# EAGLE board VDA (EAGLE 9.6.2)
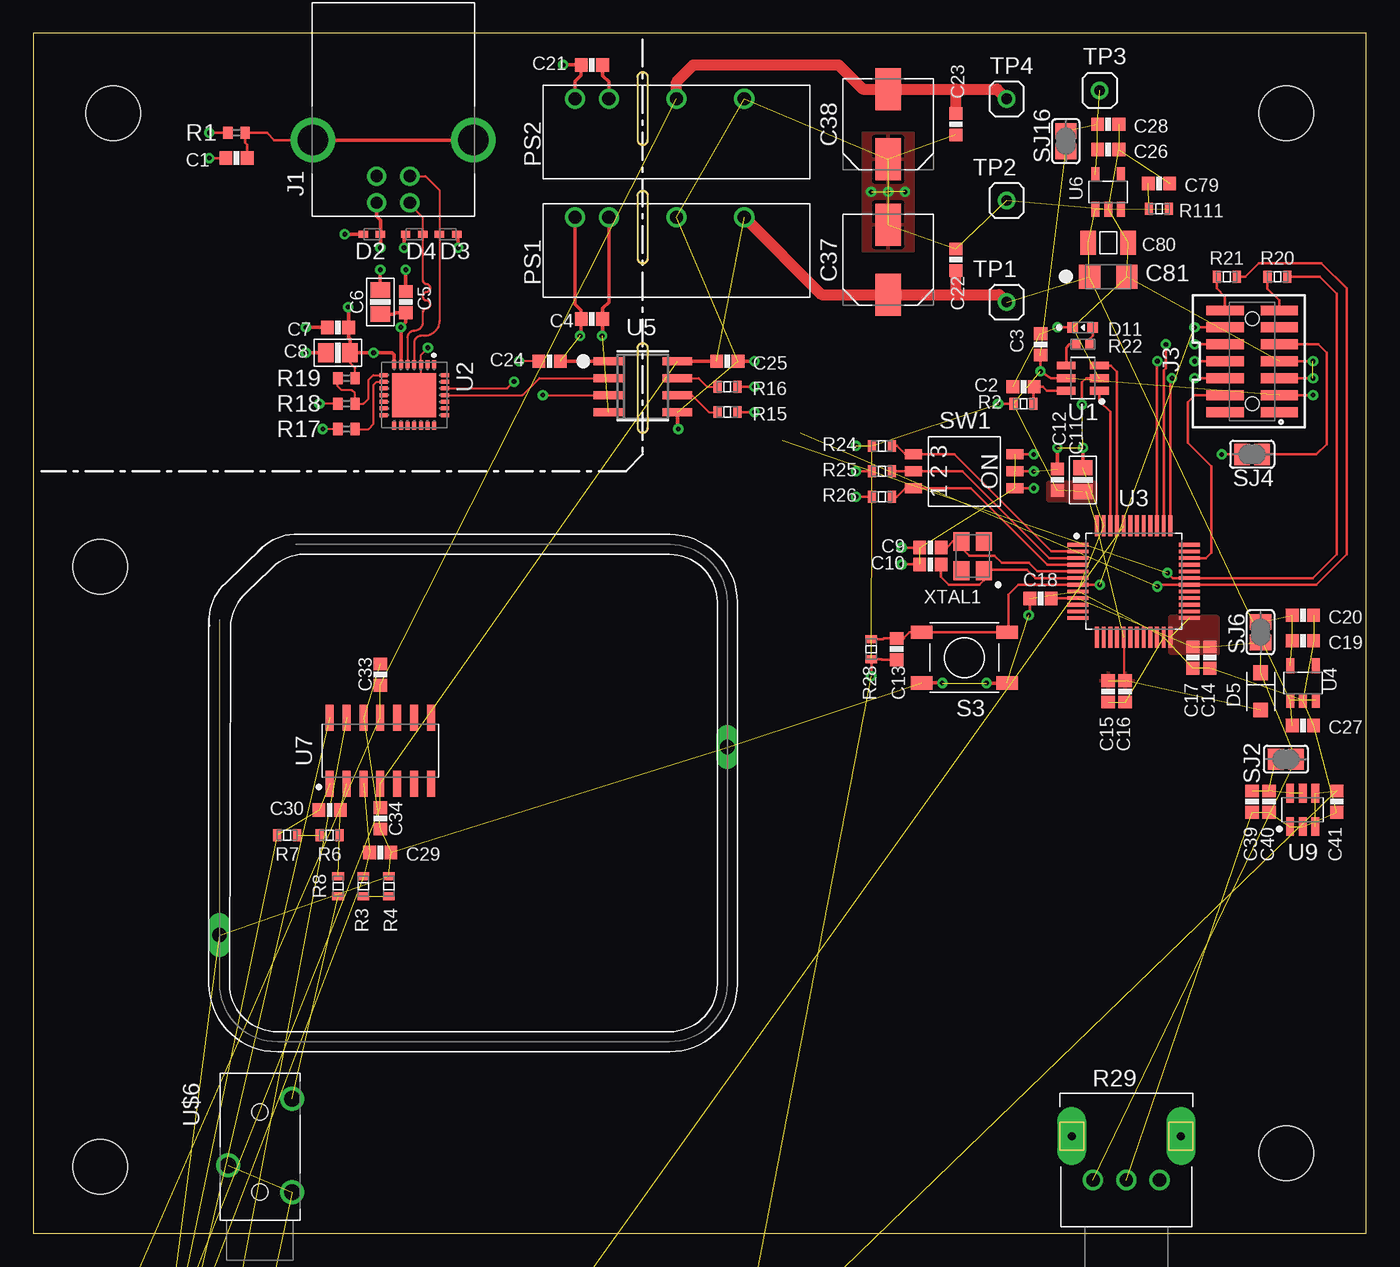
[diagram p0: board, top side]
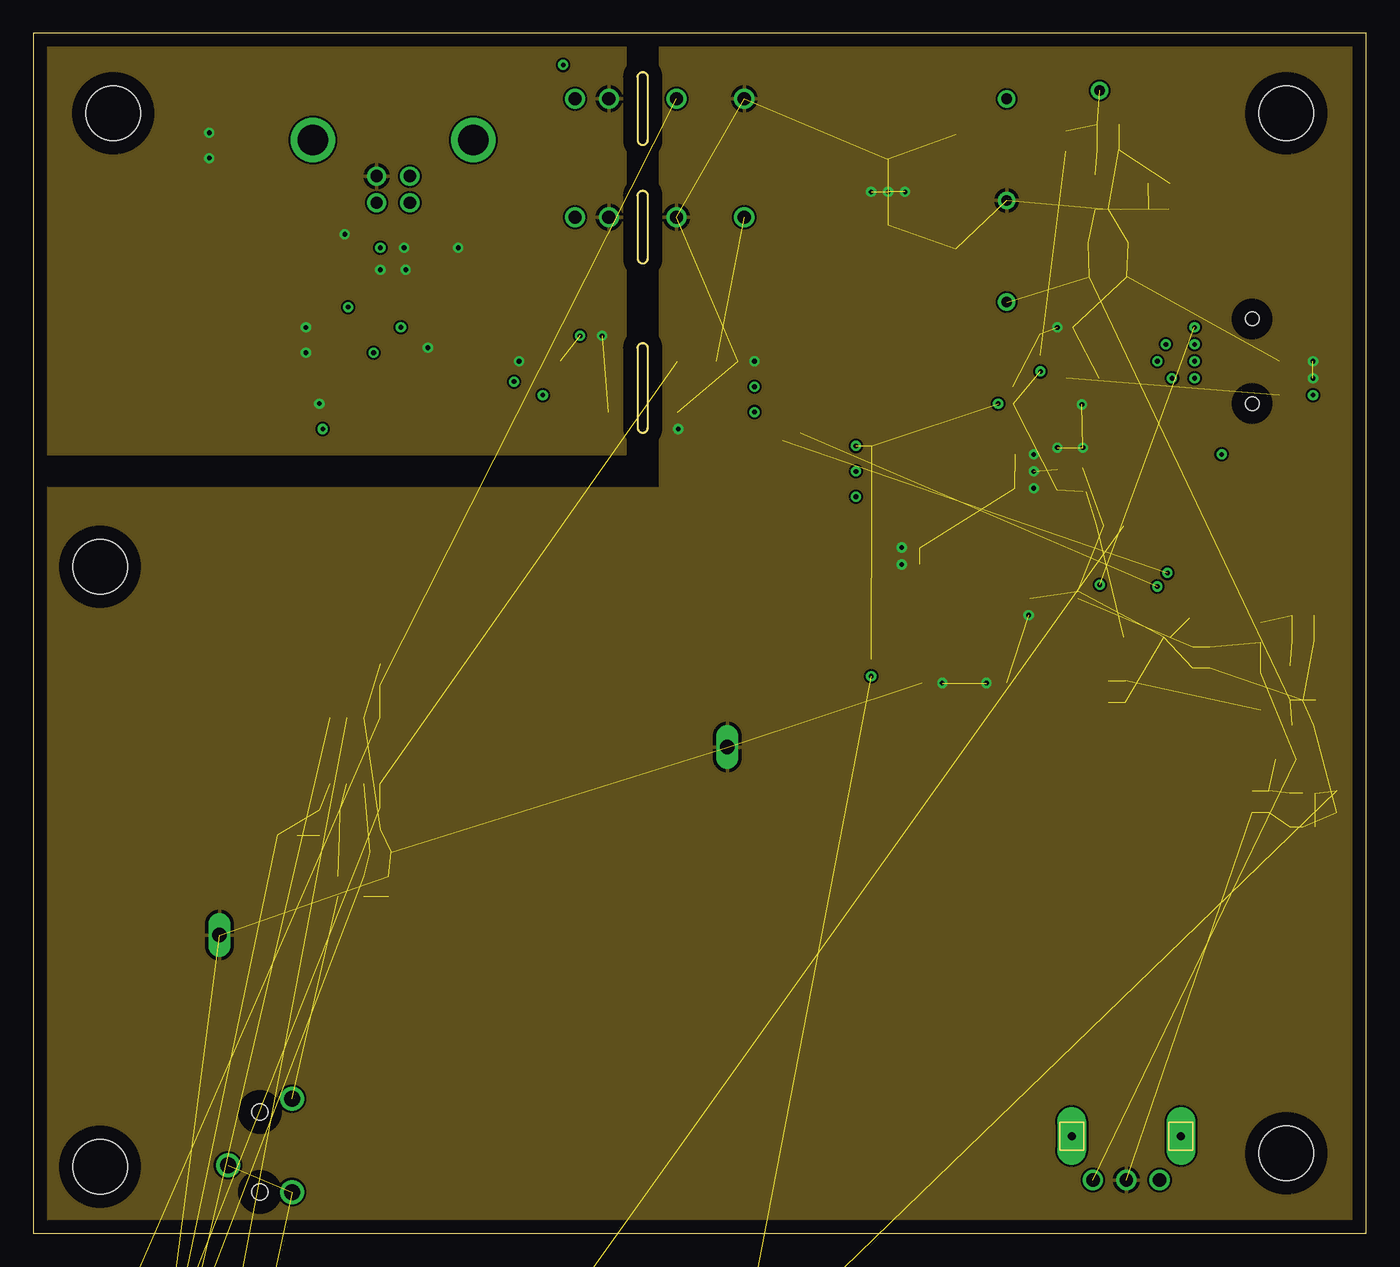
[diagram p1: board, inner layer Route2]
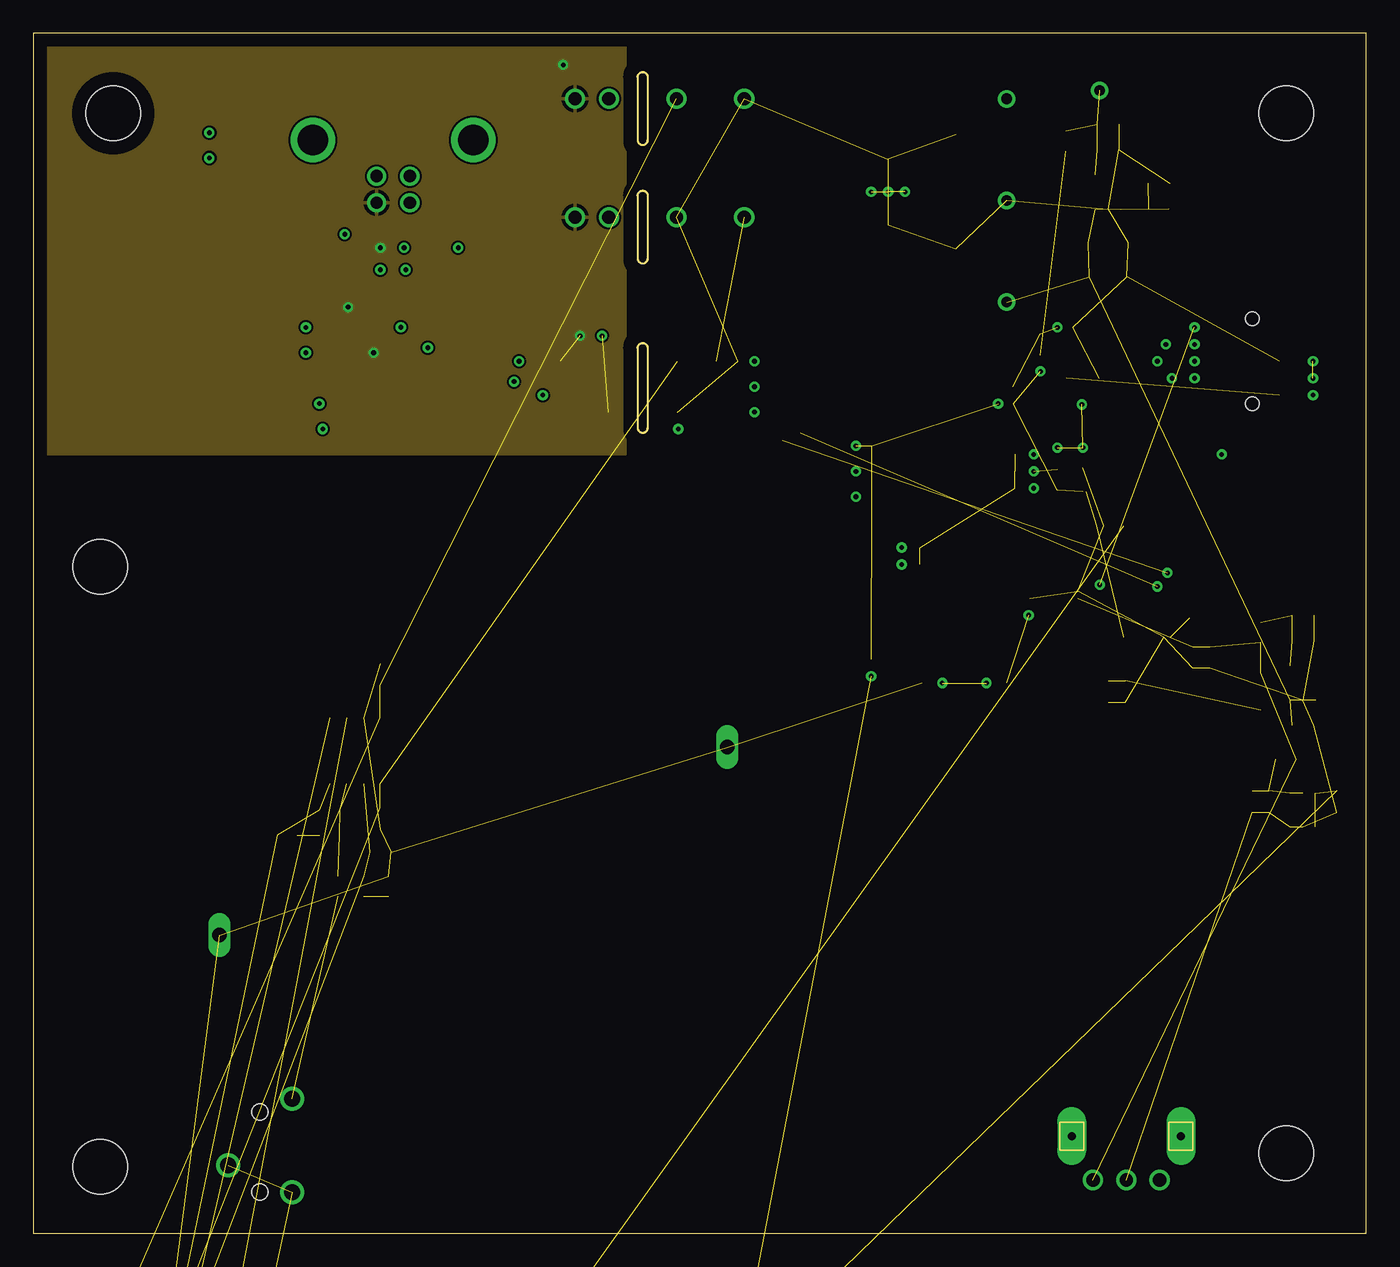
[diagram p2: board, inner layer Route15]
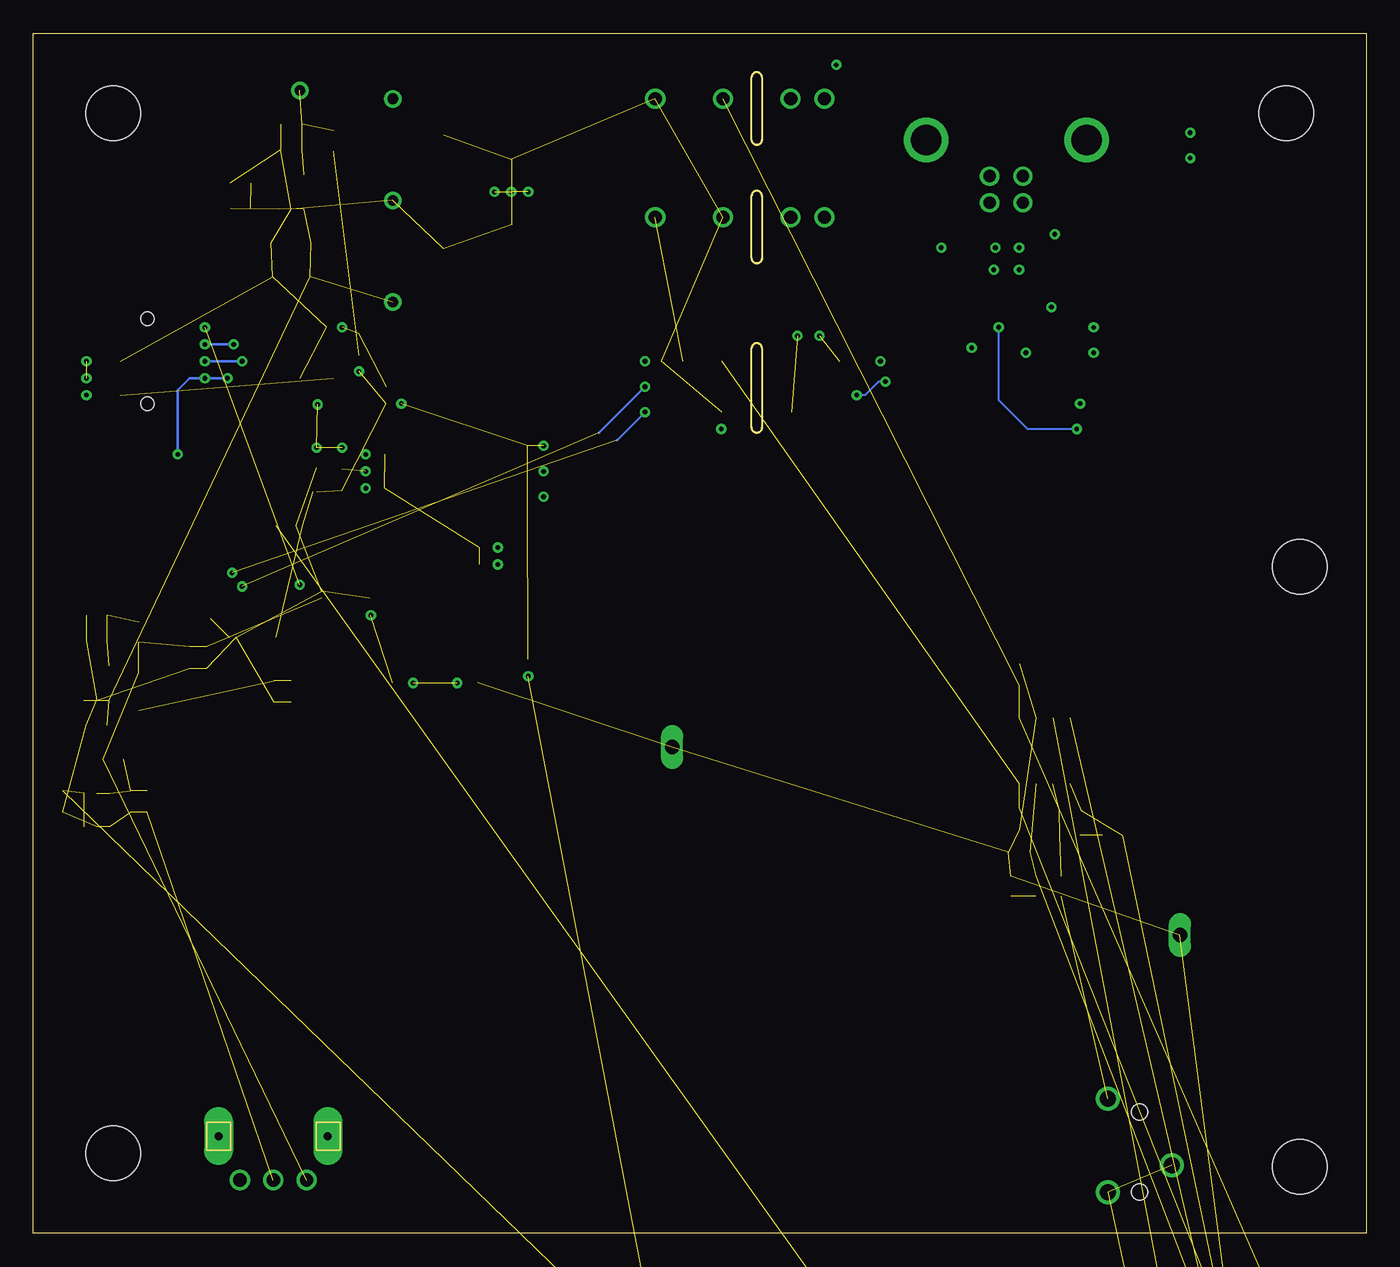
[diagram p3: board, bottom side, seen from below]

Size 100 x 90 mm. Coordinates in mm from the lower left corner, seen from the top.
Outline: 0,0 100,0 100,90 0,90 0,0
Outline: 45.34,66.39 45.34,60.42 arc90 45.72,60.04 arc90 46.1,60.42 46.1,66.39 arc90 45.72,66.77 arc90 45.34,66.39
Outline: 45.34,77.82 45.34,73.12 arc90 45.72,72.74 arc90 46.1,73.12 46.1,77.82 arc90 45.72,78.2 arc90 45.34,77.82
Outline: 45.34,86.71 45.34,82.01 arc90 45.72,81.63 arc90 46.1,82.01 46.1,86.71 arc90 45.72,87.09 arc90 45.34,86.71
Copper layers (1+2*15+16): Top 0.035mm / dielectric 0.14mm / Route2 0.035mm / dielectric 1.2mm / Route15 0.035mm / dielectric 0.2mm / Bottom 0.035mm
Design rules "default *": minimum track width 6mil, minimum drill 0.35mm, track to track 6mil, track to pad 6mil, pad to pad 6mil, via to via 6mil, smd to smd 6mil, copper to edge 40mil, drill to drill 6mil, minimum pad ring 10mil, minimum via ring 8mil, stop-mask expansion 4mil, vias tented up to drill 9999mil, thermal gap 10mil
Holes 4.1 mm at 6,84 94,84 94,6 5,5 5,50
tRestrict: area 3,81 to 9,87; area 91,81 to 97,87; area 91,3 to 97,9; area 2,2 to 8,8; area 2,47 to 8,53
bRestrict: area 3,81 to 9,87; area 91,81 to 97,87; area 91,3 to 97,9; area 2,2 to 8,8; area 2,47 to 8,53
vRestrict: area 3,81 to 9,87; area 91,81 to 97,87; area 91,3 to 97,9; area 2,2 to 8,8; area 2,47 to 8,53

## Footprints (pad centres in the part's own frame; a part is rotated, then mirrored left to right if it is on the bottom)
C_0603 = smd 0.95 x 1: P$1 -0.8,0; P$2 0.8,0
C_0805 = smd 1.15 x 1.45: P$1 -0.9,0; P$2 0.9,0
CAPAE660X590N = smd 3.165 x 1.92: + -2.625,0; - 2.625,0
C_1206 = smd 1.15 x 1.8: P$1 -1.5,0; P$2 1.5,0
A_3216 = smd 1.6 x 1.8: A -1.4,0; K 1.4,0
SOD523 = smd 0.7 x 0.5: A 0.65,0; C -0.65,0
SOD123W = smd 1.1 x 1.1: A 1.4,0; C -1.4,0
LED_0603_ARROW = smd 0.787 x 0.787: A 0.749,0; K -0.749,0
USB-B = drill 0.92: 1 1.25,4.71; 2 -1.25,4.71; 3 -1.25,2.71; 4 1.25,2.71 | drill 2.3: M1 -6.02,0; M2 6.02,0
SAMTEC_FTSH-107-01-L-DV-K-A = smd 0.74 x 2.79: 01 -3.81,-2.035; 02 -3.81,2.035; 03 -2.54,-2.035; 04 -2.54,2.035; 05 -1.27,-2.035; 06 -1.27,2.035; 07 0,-2.035; 08 0,2.035; 09 1.27,-2.035; 10 1.27,2.035; 11 2.54,-2.035; 12 2.54,2.035; 13 3.81,-2.035; 14 3.81,2.035 | hole 1.02: 3.175,0; -3.175,0
0505S-2WR3 = drill 1: +VIN -7.62,0; +VOUT 5.08,0; -VIN -5.08,0; -VOUT 0,0
R0402 = smd 0.7 x 0.9: 1 -0.65,0; 2 0.65,0
R_0603 = smd 0.61 x 0.889: 1 -0.749,0; 2 0.749,0
R_0402 = smd 0.6 x 0.6: 1 -0.5,0; 2 0.5,0
POT-09VR1M = drill 1: P$1 0,-2.5; P$2 0,0; P$3 0,2.5 | drill 0.6 pad 2.184 long: P$4 -3.3,4.1; P$5 -3.3,-4.1
SMTR2 = smd 1.6 x 1: P$1 -3.2,1.9; P$2 3.2,1.9; P$3 -3.2,-1.9; P$4 3.2,-1.9
MS384 = drill 1.1 long: P$1 -19.05,-10.65; P$2 19.05,3.45
SJ_2 = smd 1.168 x 1.6: 1 -1.524,0; 2 0,0; 3 1.524,0
SJ = smd 1.168 x 1.6: 1 -0.762,0; 2 0.762,0
DIPSW-3 = smd 0.76 x 1.27: P$1 -1.27,-3.81; P$2 -1.27,3.81; P$3 0,-3.81; P$4 0,3.81; P$5 1.27,-3.81; P$6 1.27,3.81
HOLE_0.8MM = drill 0.8: 1 0,0
SOT-23-6 = smd 1.412 x 0.59: 1 -1.247,0.95; 2 -1.247,0; 3 -1.247,-0.95; 4 1.247,-0.95; 5 1.247,0; 6 1.247,0.95
MLP28 = smd 0.6 x 0.3: 1 -2.3,1.5; 2 -2.3,1; 3 -2.3,0.5; 4 -2.3,0; 5 -2.3,-0.5; 6 -2.3,-1; 7 -2.3,-1.5; 15 2.3,-1.5; 16 2.3,-1; 17 2.3,-0.5; 18 2.3,0; 19 2.3,0.5; 20 2.3,1; 21 2.3,1.5 | smd 0.3 x 0.6: 8 -1.5,-2.3; 9 -1,-2.3; 10 -0.5,-2.3; 11 0,-2.3; 12 0.5,-2.3; 13 1,-2.3; 14 1.5,-2.3; 22 1.5,2.3; 23 1,2.3; 24 0.5,2.3; 25 0,2.3; 26 -0.5,2.3; 27 -1,2.3; 28 -1.5,2.3 | smd 3.3 x 3.3: EXP 0,0
QFP50P900X900X160-48N = smd 1.559 x 0.28: 1 -4.178,2.75; 2 -4.178,2.25; 3 -4.178,1.75; 4 -4.178,1.25; 5 -4.178,0.75; 6 -4.178,0.25; 7 -4.178,-0.25; 8 -4.178,-0.75; 9 -4.178,-1.25; 10 -4.178,-1.75; 11 -4.178,-2.25; 12 -4.178,-2.75; 25 4.178,-2.75; 26 4.178,-2.25; 27 4.178,-1.75; 28 4.178,-1.25; 29 4.178,-0.75; 30 4.178,-0.25; 31 4.178,0.25; 32 4.178,0.75; 33 4.178,1.25; 34 4.178,1.75; 35 4.178,2.25; 36 4.178,2.75 | smd 0.28 x 1.559: 13 -2.75,-4.178; 14 -2.25,-4.178; 15 -1.75,-4.178; 16 -1.25,-4.178; 17 -0.75,-4.178; 18 -0.25,-4.178; 19 0.25,-4.178; 20 0.75,-4.178; 21 1.25,-4.178; 22 1.75,-4.178; 23 2.25,-4.178; 24 2.75,-4.178; 37 2.75,4.178; 38 2.25,4.178; 39 1.75,4.178; 40 1.25,4.178; 41 0.75,4.178; 42 0.25,4.178; 43 -0.25,4.178; 44 -0.75,4.178; 45 -1.25,4.178; 46 -1.75,4.178; 47 -2.25,4.178; 48 -2.75,4.178
SOT23-5 = smd 0.6 x 1.1: 1 -0.95,-1.3; 2 0,-1.3; 3 0.95,-1.3; 4 0.95,1.3; 5 -0.95,1.3
SO8 = smd 0.6 x 2.2: 1 -1.905,-2.6; 2 -0.635,-2.6; 3 0.635,-2.6; 4 1.905,-2.6; 5 1.905,2.6; 6 0.635,2.6; 7 -0.635,2.6; 8 -1.905,2.6
SOIC127P600X175-14N = smd 1.968 x 0.602: 1 -2.473,3.81; 2 -2.473,2.54; 3 -2.473,1.27; 4 -2.473,0; 5 -2.473,-1.27; 6 -2.473,-2.54; 7 -2.473,-3.81; 8 2.473,-3.81; 9 2.473,-2.54; 10 2.473,-1.27; 11 2.473,0; 12 2.473,1.27; 13 2.473,2.54; 14 2.473,3.81
SO16 = smd 1.972 x 0.582: 1 -2.472,4.445; 2 -2.472,3.175; 3 -2.472,1.905; 4 -2.472,0.635; 5 -2.472,-0.635; 6 -2.472,-1.905; 7 -2.472,-3.175; 8 -2.472,-4.445; 9 2.472,-4.445; 10 2.472,-3.175; 11 2.472,-1.905; 12 2.472,-0.635; 13 2.472,0.635; 14 2.472,1.905; 15 2.472,3.175; 16 2.472,4.445
SOT23-6 = smd 1.412 x 0.59: 1 -1.247,0.95; 2 -1.247,0; 3 -1.247,-0.95; 4 1.247,-0.95; 5 1.247,0; 6 1.247,0.95
PJ-3200 = drill 1.2: 1 2.1,-2.4; 2 9.1,-2.4; 3 4.1,2.4 | hole 1.2: 2.1,0; 8.1,0
XTAL3.2X2.5 = smd 1.4 x 1.2: P$1 -1.1,-0.85; P$2 1.1,-0.85; P$3 1.1,0.85; P$4 -1.1,0.85

## Placement (x,y rotation side)
C1  100n  [C_0603]  15.24,80.64 180 top
C2  470n  [C_0603]  74.3,63.5 180 top
C3  100n  [C_0603]  75.56,66.67 90 top
C4  4u7  [C_0603]  41.91,68.58 0 top
C5  100n  [C_0603]  27.94,69.85 90 top
C6  4.7u  [C_0805]  26.04,69.85 90 top
C7  100n  [C_0603]  22.86,67.94 180 top
C8  4.7u  [C_0805]  22.86,66.04 180 top
C9  10p  [C_0603]  67.31,51.44 180 top
C10  10p  [C_0603]  67.31,50.16 180 top
C11  4u7  [C_0805]  78.74,56.52 90 top
C12  100n  [C_0603]  76.83,56.52 90 top
C13  100n  [C_0603]  64.77,43.81 90 top
C14  100n  [C_0603]  88.27,43.18 270 top
C15  100n  [C_0603]  80.64,40.64 270 top
C16  100n  [C_0603]  81.92,40.64 270 top
C17  100n  [C_0603]  87,43.18 270 top
C18  100n  [C_0603]  75.56,47.62 180 top
C19  100n  [C_0603]  95.25,44.45 0 top
C20  4u7  [C_0603]  95.25,46.35 0 top
C21  4u7  [C_0603]  41.91,87.63 0 top
C22  100n  [C_0603]  69.22,73.03 90 top
C23  100n  [C_0603]  69.22,83.19 90 top
C24  100n  [C_0603]  38.73,65.41 180 top
C25  100n  [C_0603]  52.07,65.41 0 top
C26  4u7  [C_0603]  80.64,81.28 0 top
C27  10u  [C_0603]  95.25,38.1 0 top
C28  100n  [C_0603]  80.64,83.19 0 top
C29  47n  [C_0603]  26.04,28.57 0 top
C30  47n  [C_0603]  22.23,31.75 180 top
C31  3.3u  [C_0603]  0.64,-74.3 0 top  (outside the outline)
C32  470n  [C_0603]  0.64,-78.11 0 top  (outside the outline)
C33  100n  [C_0603]  26.04,41.91 270 top
C34  100n  [C_0603]  26.04,31.11 270 top
C35  100n  [C_0603]  -28.57,-78.74 0 top  (outside the outline)
C36  100n  [C_0603]  -17.14,-78.74 0 top  (outside the outline)
C37  22u  [CAPAE660X590N]  64.14,73.03 90 top
C38  22u  [CAPAE660X590N]  64.14,83.19 90 top
C39  4u7  [C_0603]  91.44,32.38 270 top
C40  100n  [C_0603]  92.71,32.38 270 top
C41  10u  [C_0603]  97.79,32.38 270 top
C79  220n  [C_0603]  84.45,78.74 0 top
C80  47u  [C_1206]  80.64,74.3 0 top
C81  47u  [A_3216]  80.64,71.75 0 top
D2  LESD5D5.0CT1G  [SOD523]  25.4,74.93 0 top
D3  LESD5D5.0CT1G  [SOD523]  31.11,74.93 180 top
D4  LESD5D5.0CT1G  [SOD523]  28.57,74.93 0 top
D5  D-SOD123W  [SOD123W]  92.08,40.64 270 top
D10  GREEN  [LED_0603_ARROW]  39.37,-50.16 0 top  (outside the outline)
D11  ORANGE  [LED_0603_ARROW]  78.74,67.94 0 top
D12  ORANGE  [LED_0603_ARROW]  46.99,-50.16 0 top  (outside the outline)
J1  USB-2.0  [USB-B]  27,82 180 top
J3  FTSH-107-01-L-DV-K-A  [SAMTEC_FTSH-107-01-L-DV-K-A]  91.44,65.41 90 top
PS1  F0505S-2WR3L  [0505S-2WR3]  48.26,76.2 0 top
PS2  F0505S-2WR3L  [0505S-2WR3]  48.26,85.09 0 top
R1  47.5k  [R0402]  15.24,82.55 180 top
R2  10k  [R_0603]  74.3,62.23 180 top
R3  10M  [R_0603]  24.77,26.04 90 top
R4  10M  [R_0603]  26.67,26.04 270 top
R5  270  [R_0402]  33.66,-43.66 0 top  (outside the outline)
R6  10M  [R_0603]  22.23,29.84 0 top
R7  10M  [R_0603]  19.05,29.84 0 top
R8  100  [R_0603]  22.86,26.04 270 top
R9  2k  [R_0603]  -3.81,-72.39 0 top  (outside the outline)
R10  2k  [R_0603]  -3.81,-76.2 0 top  (outside the outline)
R11  2k  [R_0603]  -3.81,-80.01 0 top  (outside the outline)
R12  30k  [R_0603]  -28.57,-80.64 180 top  (outside the outline)
R13  10k  [R_0603]  -28.57,-82.55 180 top  (outside the outline)
R14  30k  [R_0603]  -29.21,-72.39 0 top  (outside the outline)
R15  100  [R_0603]  52.07,61.59 0 top
R16  100  [R_0603]  52.07,63.5 0 top
R17  1k  [R0402]  23.5,60.33 0 top
R18  47.5k  [R0402]  23.5,62.23 180 top
R19  22.1k  [R0402]  23.5,64.14 0 top
R20  100  [R_0603]  93.34,71.75 180 top
R21  100  [R_0603]  89.53,71.75 180 top
R22  270  [R_0402]  78.74,66.67 0 top
R23  100  [R_0603]  -11.43,-69.85 0 top  (outside the outline)
R24  10k  [R_0603]  63.66,59.05 180 top
R25  10k  [R_0603]  63.66,57.15 180 top
R26  10k  [R_0603]  63.66,55.24 180 top
R27  10k  [R_0603]  -9.68,-75.86 0 top  (outside the outline)
R28  10k  [R_0603]  62.87,43.81 270 top
R29  [POT-09VR1M]  82,4 270 top
R36  270  [R_0402]  46.99,-43.81 0 top  (outside the outline)
R111  100k  [R_0603]  84.45,76.83 0 top
S3  TSWITCH_SMTR2  [SMTR2]  69.85,43.18 0 top
SHIELD  MS384  [MS384]  33.02,33.02 0 top
SJ1  [SJ_2]  1.27,-80.64 0 top  (outside the outline)
SJ2  [SJ]  93.98,35.56 180 top
SJ4  [SJ]  91.44,58.42 180 top
SJ6  [SJ]  92.08,45.09 90 top
SJ16  [SJ]  77.47,81.92 90 top
SW1  DSHP03TSGER  [DIPSW-3]  69.85,57.15 270 top
TP1  HOLE_0.8MM  [HOLE_0.8MM]  73.03,69.85 0 top
TP2  HOLE_0.8MM  [HOLE_0.8MM]  73.03,77.47 0 top
TP3  HOLE_0.8MM  [HOLE_0.8MM]  80.01,85.72 0 top
TP4  HOLE_0.8MM  [HOLE_0.8MM]  73.03,85.09 0 top
U1  SN74LVC1G175  [SOT-23-6]  78.74,64.14 180 top
U2  CP2102N-28  [MLP28]  28.57,62.87 270 top
U3  STM32F373CBT6  [QFP50P900X900X160-48N]  82.55,48.9 0 top
U4  LP5907MFX-3.3/NOPB  [SOT23-5]  95.25,41.27 0 top
U5  ISO7721DR  [SO8]  45.72,63.5 270 top
U6  LP5907MFX-3.3/NOPB  [SOT23-5]  80.64,78.11 0 top
U7  TL072  [SOIC127P600X175-14N]  26.04,36.2 90 top
U8  LM13700  [SO16]  -22.86,-76.83 0 top  (outside the outline)
U9  REF3433IDBVR  [SOT23-6]  95.23,31.75 90 top
U$6  STEREO-JACK  [PJ-3200]  17,1 90 top
XTAL1  8MHz  [XTAL3.2X2.5]  70.48,50.8 90 top

## Library data of the parts
C1-C3 C5-C18 C22-C25 C29-C38 C79 C81 D10-D12 R2-R4 R6-R16 R20 R21 R23-R29 R111 = Property-standar
C4 C19-C21 C26-C28 C39-C41 = Property-standar; V: 16V
C80 = Property-standar; D: X7R; ESR: LOW; V: 10V
D2-D4 S3 U2 U3 U7 = property
D5 = Property-standar; TYPE: Schotky
J1 U$6 = Connectors
J3 = property-connectors; MANUFACTURER: Samtec; MAXIMUM_PACKAGE_HEIGHT: 6.23mm; PARTREV: H; STANDARD: Manufacturer Recommendation
PS1 PS2 U9 = Power-Supply
R1 R17-R19 = resistor
R5 R22 R36 = Property-standar; TOL: 1%
SHIELD = shields
SJ1 SJ2 SJ4 SJ6 SJ16 = jumper
SW1 = properti-mechanical
TP1-TP4 = property-connectors
U1 U5 = property_digital
U4 U6 = property-power
U8 = property_analog
XTAL1 = property; MPN: 830108313809

## Nets
+3V3: C3.P$1 C11.P$1 C12.P$1 C13.P$1 C15.P$1 C16.P$1 D5.A J3.03 R2.2 R5.1 R24.2 R25.2 R26.2 R28.2 R36.1 SJ16.1 U1.5 U3.17 U3.48
+3V3A: C14.P$1 C17.P$1 C18.P$1 D5.C R29.P$1 SJ2.1 SJ6.1 U3.9 U3.24 U3.25
+5V: C22.P$1 C25.P$1 C27.P$1 C34.P$1 C36.P$1 C37.+ C41.P$1 C80.P$1 C81.A PS1.+VOUT R111.2 TP1.1 U4.1 U4.3 U5.8 U6.1 U7.4 U8.11 U9.3 U9.4
-5V: C23.P$2 C33.P$2 C35.P$2 C38.- PS2.-VOUT R13.2 TP4.1 U7.11 U8.6
BOOT0: R27.1 U3.44
DAC_OUT: R14.1
FF_CLK: U1.1 U3.46
FF_CLR: C2.P$1 R2.1 U1.6
FF_D: U1.3 U3.45
GND: C2.P$2 C3.P$2 C9.P$2 C10.P$2 C11.P$2 C12.P$2 C14.P$2 C15.P$2 C16.P$2 C17.P$2 C18.P$2 C19.P$2 C20.P$2 C22.P$2 C23.P$1 C25.P$2 C26.P$2 C27.P$2 C28.P$2 C29.P$2 C31.P$2 C33.P$1 C34.P$2 C35.P$1 C36.P$2 C37.- C38.+ C39.P$2 C40.P$2 C41.P$2 C79.P$2 C80.P$2 C81.K D11.K J3.05 J3.07 PS1.-VOUT PS2.+VOUT R4.1 R12.2 R27.2 R29.P$2 S3.P$3 S3.P$4 SHIELD.P$1 SHIELD.P$2 SJ1.3 SW1.P$2 SW1.P$4 SW1.P$6 TP2.1 U1.2 U3.8 U3.23 U3.47 U4.2 U5.5 U6.2 U7.12 U9.1 U9.2
GND1: C30.P$2 R7.1 R9.2 U7.1
GND-1: C1.P$2 C4.P$2 C5.P$2 C6.P$2 C7.P$2 C8.P$2 C21.P$2 C24.P$2 D2.C D3.C D4.C J1.4 PS1.-VIN PS2.-VIN R1.2 R18.2 U2.3 U2.EXP U5.4
JCLK: J3.06 SJ4.2 U3.37
JRCLK: J3.09 SJ4.1
JTDI: J3.10 U3.38
JTDO: J3.08 U3.39
JTMS: J3.04 U3.34
LED_ACQ: D12.K
LED_PWR: D10.K
MANUAL_GAIN: R29.P$3
MCU_RX: J3.13 R20.2
MCU_TX: J3.14 R21.2
N$1: C26.P$1 C28.P$1 SJ16.2 TP3.1 U6.5
N$2: C29.P$1 R3.2 R23.1 U7.3
N$3: R3.1 R4.2
N$4: C30.P$1 R6.2 R8.1 U7.2
N$5: R6.1 R7.2
N$6: SJ1.2 U$6.1 U$6.3
N$7: C31.P$1 R9.1 R10.2 R11.2
N$8: D12.A R36.2
N$9: R12.1 U8.5 U8.7
N$10: C32.P$1 R10.1 U7.14
N$11: C32.P$2 R11.1 U7.13
N$12: R13.1 U8.8
N$13: R14.2 U8.1
N$14: D10.A R5.2
N$15: D11.A R22.2
N$16: R8.2 U$6.2
N$17: R23.2 SJ1.1
N$18: R22.1 U1.4
N$19: C39.P$1 C40.P$1 SJ2.2 U9.5 U9.6
N$46: C79.P$1 R111.1 U6.3
N$50: C19.P$1 C20.P$1 SJ6.2 U4.5
N$54: R17.2 U2.9
NRST: C13.P$2 J3.12 R28.1 S3.P$1 S3.P$2 U3.7
ON_MODE: R24.1 SW1.P$1 U3.2
OSC2_IN: C9.P$1 U3.5 XTAL1.P$3
OSC2_OUT: C10.P$1 U3.6 XTAL1.P$1
PV: U3.28
RS_MODE: R25.1 SW1.P$3 U3.3
RXD: U2.25 U5.2
SHIELD: C1.P$1 J1.M1 J1.M2 R1.1
SP1: U3.19
SP_MODE: R26.1 SW1.P$5 U3.4
TXD: U2.26 U5.3
USART_RX: R15.2 R20.1 U3.31
USART_TX: R16.2 R21.1 U3.30
USB_DET: R18.1 R19.1 U2.8
USB_DN: D4.A J1.2 U2.5
USB_DP: D3.A J1.3 U2.4
USB_RXD: R16.1 U5.7
USB_TXD: R15.1 U5.6
VBAT: U3.1
VDD_BRIDGE: C5.P$1 C6.P$1 R17.1 U2.6
VUSB: C4.P$1 C7.P$1 C8.P$1 C21.P$1 C24.P$1 D2.A J1.1 PS1.+VIN PS2.+VIN R19.2 U2.7 U5.1

## Tracks (layer width: path | path; a pad name or v marks a point on that pad's centre or on a via)
+3V3  (via drill 0.35)  (16 unrouted)
  Top 0.152: U3.17 81.8,41.55 C16.P$1
  Top 0.203: C13.P$1 63.68,43.02 63.63,43.07 R28.2 v62.87,41.78 | R26.2 v61.72,55.24 | R25.2 v61.72,57.15 | J3.03 v96.01,62.87 | 75.56,65.53 C3.P$1 v75.56,64.64 76.33,64.14 U1.5 | R2.2 v72.39,62.23
  Top 0.254: 78.99,55.62 C11.P$1
  other vias: 61.72,59.05
  pour Top (no thermals): 76.2,56.39 79.63,56.39 79.76,56.26 79.76,54.99 79.63,54.86 76.2,54.86 76.07,54.99 76.07,56.26
  pour Top: 80.01,40.89 82.55,40.89 82.55,42.04 80.01,42.04
+3V3A  (8 unrouted)
  Top 0.203: U3.9 76.39,47.65 C18.P$1
  pour Top (no thermals): 85.22,43.56 85.22,46.23 85.34,46.35 88.77,46.35 88.9,46.23 88.9,43.43 85.34,43.43
+5V  (15 unrouted)
  Top 0.254: U5.8 C25.P$1
  Top 0.813: PS1.+VOUT 59.14,70.4 C37.+ 69.22,70.4 | 69.22,70.4 72.47,70.4 TP1.1 | 69.22,70.4 C22.P$1
-5V  (5 unrouted)
  Top 0.813: PS2.-VOUT 48.26,86.36 49.53,87.63 60.41,87.63 62.23,85.81 C38.- 69.22,85.81 | 69.22,85.81 72.31,85.81 TP4.1 | C23.P$2 69.22,85.81
BOOT0  (1 unrouted)
FF_CLK
  Top 0.203: U1.1 79.99,62.42 80.8,61.61 U3.46
FF_CLR
  Top 0.203: U1.6 76.05,63.19 75.73,63.5 C2.P$1 75.04,63.45 R2.1
FF_D
  Top 0.203: U1.3 80.84,65.08 81.3,64.62 U3.45
GND  (via drill 0.35)  (63 unrouted)
  Top 0.203: C10.P$2 v65.15,50.16 | C9.P$2 v65.15,51.44 | SW1.P$6 v75.06,55.88 | SW1.P$4 v75.06,57.15 | SW1.P$2 v75.06,58.42 | C18.P$2 74.77,46.44 v74.68,46.35 | J3.07 v96.01,65.41 | J3.05 v96.01,64.14 | D11.K v76.83,67.94 | U1.2 78.99,64.14 78.67,63.81 v78.67,62.16
  Top 0.254: U5.5 48.32,60.39 v48.39,60.33 | C25.P$2 v54.1,65.41 | S3.P$3 v68.19,41.28 v68.2,41.27 | S3.P$4 v71.5,41.27 | C11.P$2 v78.74,58.93 | C12.P$2 v76.83,58.93
  other vias: 62.87,78.11 64.14,78.11 65.41,78.11
  pour Route2: 46.99,91.44 46.99,55.88 -1.27,55.88 -1.27,-1.27 101.6,-1.27 101.6,91.44
  pour Top: 62.23,82.55 62.23,73.66 66.04,73.66 66.04,82.55
GND1  (3 unrouted)
GND-1  (via drill 0.35)  (1 unrouted)
  Top 0.152: R18.2 v21.46,62.23 | v29.6,66.41 29.07,65.89 U2.3 29.07,63.37 U2.EXP | C24.P$2 v36.45,65.41
  Top 0.203: R1.2 v13.21,82.55 | C1.P$2 v13.21,80.64
  Top 0.254: C6.P$2 v26.04,72.26 | C5.P$2 v27.94,72.26 | C7.P$2 v20.45,67.94 | C8.P$2 v20.45,66.04 | PS2.-VIN 43.18,86.36 42.71,86.83 C21.P$2 | PS1.-VIN 43.18,69.85 42.71,69.38 C4.P$2 42.71,67.35 v42.67,67.31 | D2.C v23.37,74.93 | D4.C 27.81,74.82 v27.81,73.91 | D3.C 31.88,74.82 v31.88,73.91
  pour Route2: -1.27,91.44 -1.27,58.42 44.45,58.42 44.45,91.44
JCLK  (via drill 0.35)
  Top 0.203: v89.15,58.42 SJ4.2 | U3.37 85.3,64 v85.43,64.14 | J3.06 v87.12,64.14
  Bottom 0.203: v85.43,64.14 v87.12,64.14 88.27,64.14 89.15,63.25 v89.15,58.42
JRCLK
  Top 0.203: SJ4.1 96.27,58.42 97.03,59.18 97.03,66.04 96.39,66.67 J3.09
JTDI  (via drill 0.35)
  Top 0.203: 89.28,66.55 J3.10 v87.12,66.67 | v84.96,66.67 84.96,64.9 84.8,64.73 U3.38
  Bottom 0.203: v87.12,66.67 v84.96,66.67
JTDO  (via drill 0.35)
  Top 0.203: U3.39 84.3,65.38 v84.33,65.41 | v87.12,65.41 J3.08
  Bottom 0.203: v84.33,65.41 v87.12,65.41
JTMS
  Top 0.203: U3.34 87.98,50.65 88.39,51.05 88.39,57.53 86.61,59.31 86.61,62.33 87.15,62.87 J3.04
MCU_RX
  Top 0.203: R20.2 92.6,70.86 93.47,69.98 J3.13
MCU_TX
  Top 0.203: R21.2 88.79,70.87 89.41,70.25 J3.14
N$1  (4 unrouted)
N$2  (3 unrouted)
N$3  (1 unrouted)
N$4  (3 unrouted)
N$5  (1 unrouted)
N$6  (2 unrouted)
N$7  (3 unrouted)
N$8  (1 unrouted)
N$9  (2 unrouted)
N$10  (2 unrouted)
N$11  (2 unrouted)
N$12  (1 unrouted)
N$13  (1 unrouted)
N$14  (1 unrouted)
N$15
  Top 0.203: D11.A 79.49,67.31 79.24,67.06 R22.2
N$16  (1 unrouted)
N$17  (1 unrouted)
N$18
  Top 0.203: U1.4 77.49,66.44 77.73,66.67 R22.1
N$19  (4 unrouted)
N$46  (2 unrouted)
N$50  (3 unrouted)
N$54
  Top 0.152: R17.2 25.15,60.33 25.53,60.71 25.53,63.63 25.77,63.87 U2.9
NRST  (via drill 0.35)  (1 unrouted)
  Top 0.203: R28.1 63.75,44.56 63.8,44.62 C13.P$2 | 65.28,44.62 65.74,45.08 S3.P$1 S3.P$2 73.15,45.18 73.15,47.88 73.92,48.65 U3.7 v80.01,48.65 v80.01,48.64 | J3.12 v87.12,67.94
  Top 0.254: C13.P$2 65.28,44.62
ON_MODE
  Top 0.203: U3.2 76.36,51.15 69.09,58.42 SW1.P$1 65.42,58.42 64.79,59.05 R24.1
OSC2_IN
  Top 0.203: U3.5 75.32,49.65 74.69,50.28 72.66,50.28 72.12,50.82 70.25,50.82 69.64,51.43 XTAL1.P$3 69,51.9 68.53,51.44 C9.P$1
OSC2_OUT
  Top 0.203: U3.6 75.2,49.15 74.56,49.78 71.42,49.78 XTAL1.P$1 71.33,48.98 70.99,48.64 68.71,48.64 68.11,49.24 C10.P$1
RS_MODE
  Top 0.203: U3.3 76.23,50.65 69.72,57.15 SW1.P$3 R25.1
RXD
  Top 0.152: U2.25 36.7,62.87 37.97,64.14 U5.2
SHIELD
  Top 0.203: C1.P$1 16.04,81.64 15.89,81.79 R1.1 17.53,82.55 18.08,82 J1.M2
  Top 0.254: J1.M2 J1.M1
SP_MODE
  Top 0.203: U3.4 76.09,50.15 70.36,55.88 SW1.P$5 65.42,55.88 64.79,55.24 R26.1
TXD  (via drill 0.35)
  Top 0.152: U2.26 35.55,63.37 v36.07,63.88 | v38.23,62.87 U5.3
  Bottom 0.152: v36.07,63.88 36.58,63.88 37.59,62.87 v38.23,62.87
USART_RX  (via drill 0.35)  (1 unrouted)
  Top 0.203: R15.2 v54.1,61.59 | v85.09,49.53 85.47,49.15 U3.31 96.01,49.15 97.79,50.93 97.79,70.48 96.52,71.75 R20.1
  Bottom 0.203: v54.1,61.59 56.22,59.47
USART_TX  (via drill 0.35)  (1 unrouted)
  Top 0.203: R16.2 v54.1,63.5 | v84.33,48.51 84.46,48.65 U3.30 96.27,48.65 98.55,50.93 98.55,70.87 96.65,72.77 91.95,72.77 90.93,71.75 R21.1
  Bottom 0.203: v54.1,63.5 57.54,60.06
USB_DET
  Top 0.152: R19.1 22.84,63.52 23.11,63.25 23.88,63.25 24.13,62.99 24.13,62.24 R18.1 24.77,62.23 25.15,62.61 25.15,64.01 25.5,64.36 U2.8
USB_DN
  Top 0.152: J1.2 28.25,77.16 29.23,76.19 D4.A 29.23,71.47 arc90 29.49,71.2 arc-90 29.76,70.94 29.76,70.85 arc-90 29.49,70.59 arc90 29.23,70.32 29.23,70.24 arc90 29.49,69.97 arc-90 29.76,69.7 29.76,69.62 arc-90 29.49,69.36 arc90 29.23,69.09 29.23,68.34 arc-90 28.57,67.69 arc90 28.07,67.19 U2.5
USB_DP
  Top 0.152: J1.3 29.42,79.29 30.48,78.23 30.48,74.94 D3.A 30.46,68.44 arc-90 29.34,67.31 29.08,67.31 arc90 28.57,66.8 U2.4
USB_RXD
  Top 0.152: U5.7 49.92,64.14 50.56,63.5 R16.1
USB_TXD
  Top 0.152: U5.6 49.42,62.87 50.69,61.59 R15.1
VDD_BRIDGE  (via drill 0.35)
  Top 0.152: R17.1 v21.72,60.33
  Top 0.254: U2.6 v27.57,67.96 27.94,68.33 C5.P$1 27.18,69.05 27.08,68.95 C6.P$1
  Bottom 0.152: v21.72,60.33 25.4,60.33 27.57,62.5 v27.57,67.96
VUSB  (via drill 0.35)  (1 unrouted)
  Top 0.152: R19.2 24.14,64.89 23.76,65.28 C8.P$1
  Top 0.254: U2.7 27.07,65.89 26.92,66.04 v25.53,66.04 C8.P$1 23.76,67.08 23.66,67.18 C7.P$1 23.66,69.43 v23.62,69.47 | U5.1 C24.P$1 | PS2.+VIN 40.64,86.4 41.11,86.87 C21.P$1 v39.75,87.63 | PS1.+VIN 40.64,69.69 41.11,69.22 C4.P$1 41.11,67.56 41.02,67.47 v41.02,67.31 | J1.1 25.75,76.27 26.05,75.97 D2.A 26.05,73.93 v26.04,73.91
  pour Route15: -1.27,91.44 -1.27,58.42 44.45,58.42 44.45,91.44